# Altium PCB mct5.PcbDoc (part 2 of 3)
Units mil, origin at the board's own origin, x right, y up, seen from the top; angles counter-clockwise.
Board outline 3925 x 3925 mil, 2 copper layers (TopLayer, BottomLayer); 78 components, 100 nets, 891 pads, 16 vias.
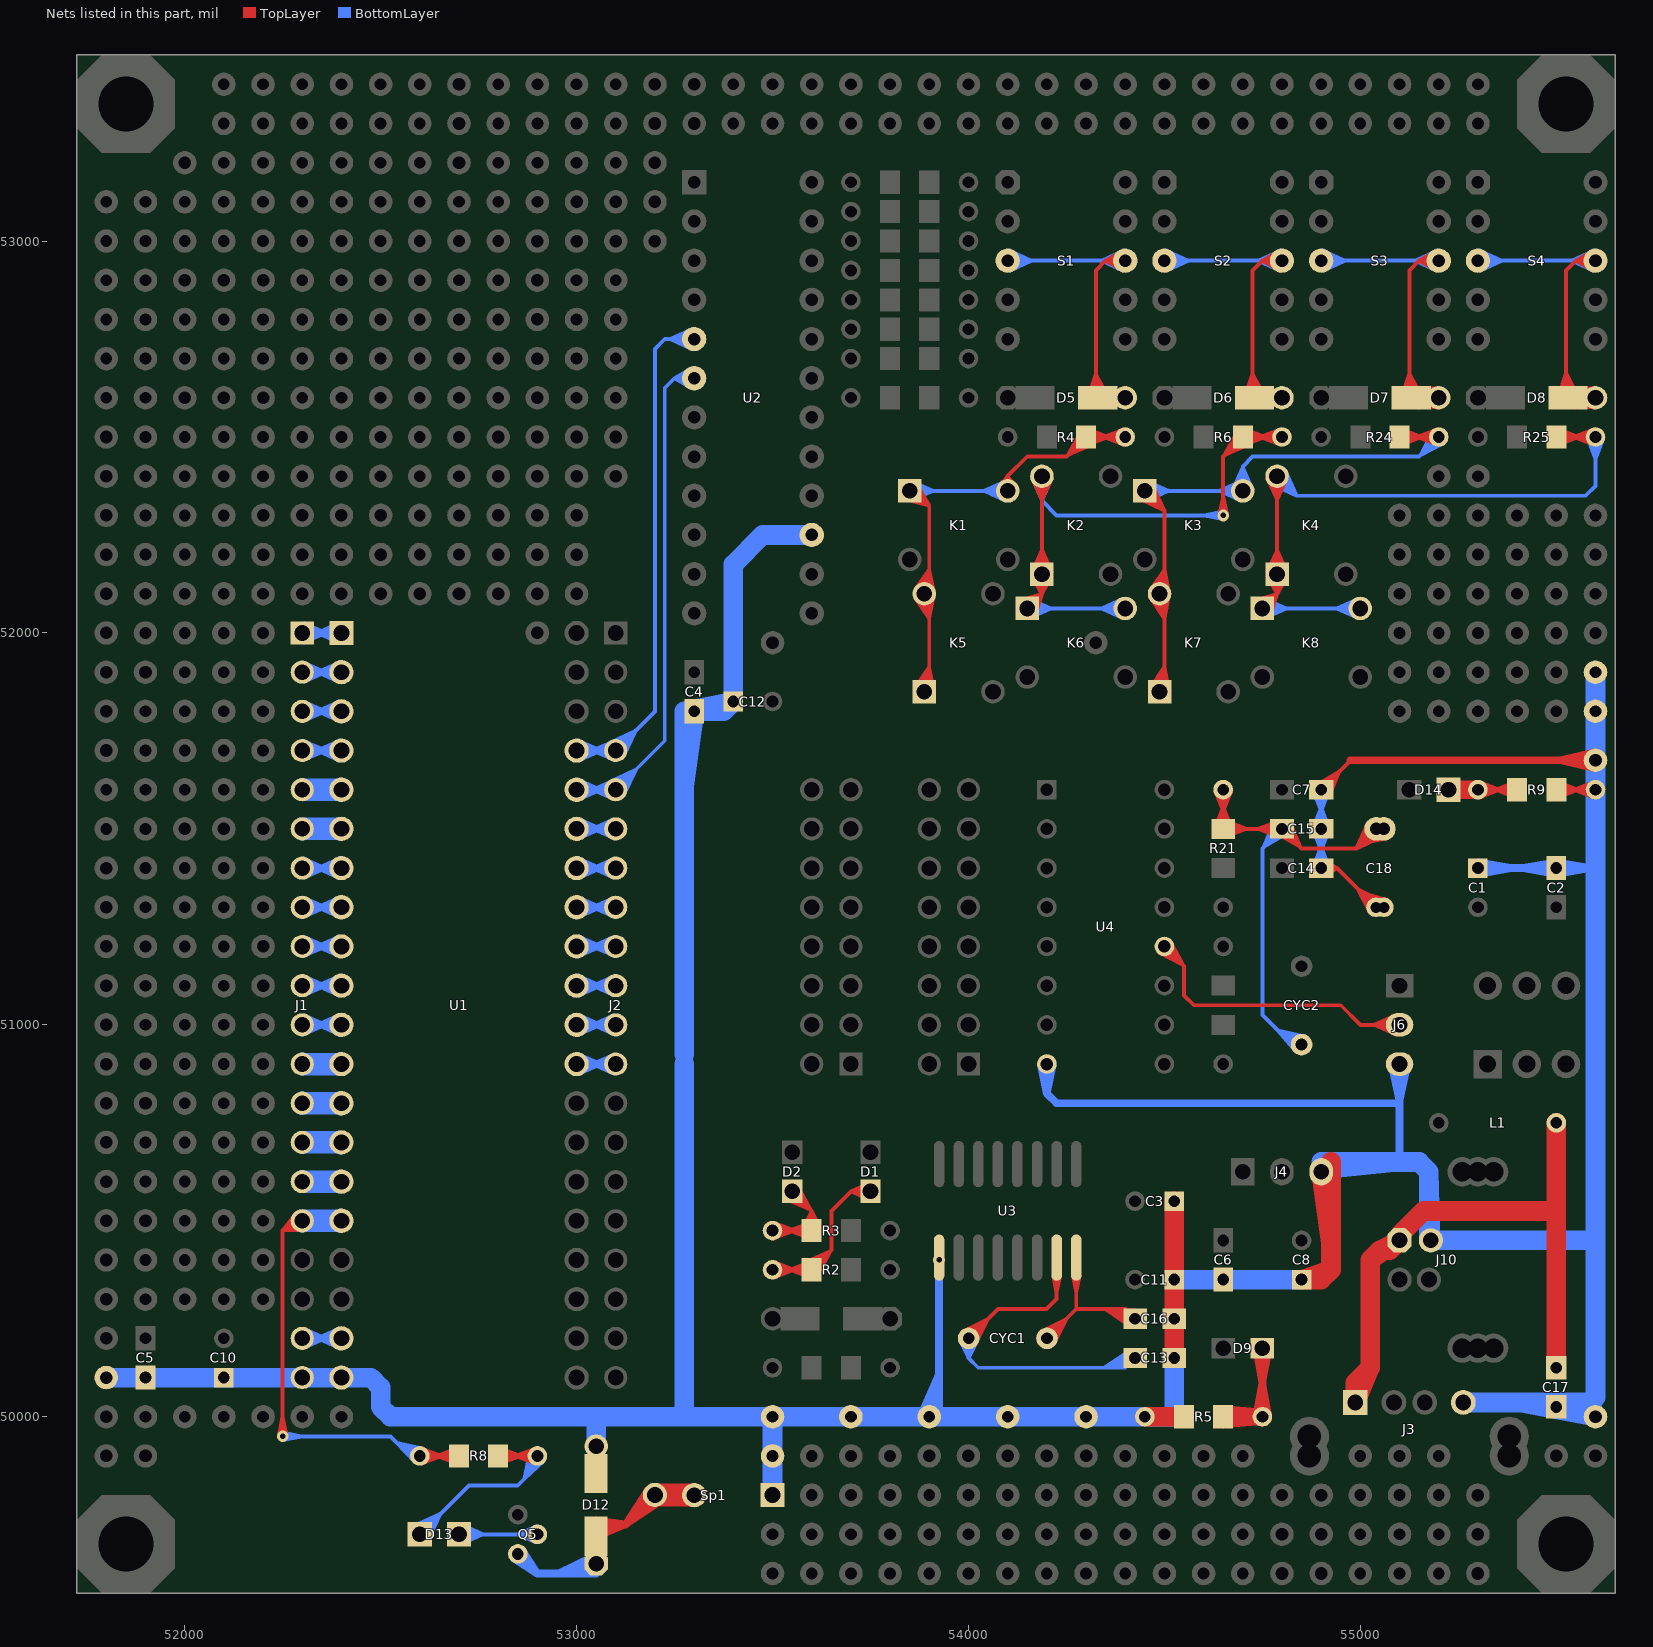
[diagram p2: the nets of this part, all layers, seen from the top]

## Via types
v1: diameter 30, hole 14, TopLayer to BottomLayer, 15 vias
v2: diameter 40, hole 28, TopLayer to BottomLayer, 1 vias

## Nets (pads, with @x,y where several pads share a name; then routed paths per layer and width w, separated by ;. In a path a pad name is that pad's centre, name@x,y a point inside that pad or via, vN(x,y) a via of type N, cw(c..) or ccw(c..) an arc to the next point about the centre after c; other vN are vias at no path point) (continued)
GND: C1.1 C2.2 C3.1 C4.2 C5.2 C6.2 C7.2 C8.1 C10.1 C11.2 C12.1 C13.2 C14.2 C15.2 C16.2 C17.2 C18.2 D12.2 D12.4 J1.20 J3.4 J4.3 J6.3 J10.4 pad.0@55600,51675 pad.7@55600,51800 pad.19@55600,51900 pad.27@54300,50000 pad.28@54100,50000 pad.29@53900,50000 pad.30@53700,50000 pad.31@53500,50000 pad.44@53500,49900 pad.45@55600,50000 pad.55 R5.1 R5.3 R9.1 R9.3 Sp1.1 U1.20 U2.15 U3.1 U4.8 | length 20800.3
  TopLayer w10: C7.2@54893.26,51615.42 54946.21,51646.21 ; C7.2@54899.02,51607.16 54946.21,51646.21 ; C14.2@54900,51400 54940,51400 ; C14.2@54906,51400 54940,51400 ; C7.2@54906,51600 54946.21,51646.21 ; C14.2@54907.47,51390.11 54940,51400 ; C14.2@54907.47,51409.89 54940,51400 ; C14.2@54911.88,51380.88 54940,51400 ; C14.2@54911.88,51419.12 54940,51400 ; C7.2@54914.05,51594.07 54946.21,51646.21 ; C7.2@54923.03,51589.51 54946.21,51646.21 ; 54925,51625 54975,51675 ; C18.2@55023.86,51288.19 54993.79,51346.21 ; C18.2@55032.41,51293.49 54993.79,51346.21 ; C18.2@55046.51,51307.59 54993.79,51346.21 ; C18.2@55046.77,51285 55003.64,51336.36 ; C18.2@55051.81,51316.14 54993.79,51346.21 ; C18.2@55053.97,51292.02 55003.64,51336.36 ; C18.2@55060,51300 55003.64,51336.36 ; C18.2@55064.78,51308.78 55003.64,51336.36 ; C18.2@55068.22,51318.23 55003.64,51336.36 ; R9.3@55500,51600 R9.1@55600,51600 ; R9.3@55501.01,51589.46 55555.59,51600 ; R9.3@55501.01,51610.54 55555.59,51600 ; R9.3@55503.81,51579.77 55555.59,51600 ; R9.3@55503.81,51620.23 55555.59,51600 ; R9.1@55596.36,51580.33 55545,51600 ; R9.1@55596.36,51619.67 55545,51600 ; R9.1@55599.09,51590.04 55545,51600 ; R9.1@55599.09,51609.96 55545,51600 ; 54940,51400 C18.2@55040,51300 ; 55003.64,51336.36 C18.2@55023.38,51288.88 ; 55003.64,51336.36 C18.2@55051.12,51316.62 ; 55003.64,51336.36 C18.2@55032.27,51293.65 ; 55003.64,51336.36 C18.2@55046.35,51307.73 ; 55003.64,51336.36 C18.2@55040,51300 ; 55003.64,51336.36 C18.2@55023.38,51288.88 ; 55003.64,51336.36 C18.2@55051.12,51316.62 ; 55003.64,51336.36 C18.2@55032.27,51293.65 ; 55003.64,51336.36 C18.2@55046.35,51307.73 ; 55003.64,51336.36 C18.2@55040,51300 ; 55003.64,51336.36 C18.2@55023.38,51288.88 ; 55003.64,51336.36 C18.2@55051.12,51316.62 ; 55003.64,51336.36 C18.2@55032.27,51293.65 ; 55003.64,51336.36 C18.2@55046.35,51307.73 ; 55003.64,51336.36 C18.2@55040,51300 ; 55003.64,51336.36 C18.2@55023.38,51288.88 ; 55003.64,51336.36 C18.2@55051.12,51316.62 ; 55003.64,51336.36 C18.2@55032.27,51293.65 ; 55003.64,51336.36 C18.2@55046.35,51307.73 ; 55003.64,51336.36 C18.2@55040,51300 ; 55003.64,51336.36 C18.2@55023.38,51288.88 ; 55003.64,51336.36 C18.2@55051.12,51316.62 ; 55003.64,51336.36 C18.2@55032.27,51293.65 ; 55003.64,51336.36 C18.2@55046.35,51307.73 ; 55003.64,51336.36 C18.2@55040,51300
  TopLayer w20: 54975,51675 pad.0@55600,51675 ; pad.0@55597.78,51655.12 55510,51675 pad.0@55597.78,51694.88
  TopLayer w50: R5.1@54450,50000 R5.3@54550,50000 ; C13.2@54525,50150 C16.2@54525,50250 C11.2@54525,50350 C3.1@54525,50550 ; J4.3@54900,50620 54925,50436.26 ; 54925,50650 54925,50375 ; C8.1@54850,50350 54900,50350 ; C8.1@54850,50350 54925,50375 ; C8.1@54850,50350 54900,50350 ; 54900,50350 54925,50375
  BottomLayer w10: C14.2@54880.33,51403.64 54900,51455 ; C15.2@54880.33,51496.36 54900,51445 ; C15.2@54880.33,51503.64 54900,51555 ; C7.2@54880.33,51596.36 54900,51545 ; C14.2@54890.04,51400.91 54900,51455 ; C15.2@54890.04,51499.09 54900,51445 ; C15.2@54890.04,51500.91 54900,51555 ; C7.2@54890.04,51599.09 54900,51545 ; C14.2@54900,51400 C15.2@54900,51500 C7.2@54900,51600 ; C14.2@54909.96,51400.91 54900,51455 ; C15.2@54909.96,51499.09 54900,51445 ; C15.2@54909.96,51500.91 54900,51555 ; C7.2@54909.96,51599.09 54900,51545 ; C14.2@54919.67,51403.64 54900,51455 ; C15.2@54919.67,51496.36 54900,51445 ; C15.2@54919.67,51503.64 54900,51555 ; C7.2@54919.67,51596.36 54900,51545
  BottomLayer w20: pad.29@53880.99,50006.21 53925,50108.66 ; pad.29@53900,50000 53925,50108.66 ; pad.29@53919.81,49997.28 53925,50108.66 ; 53925,50025 v1(53925,50400) ; U4.8@54185.08,50898.5 54200,50825 ; U4.8@54200,50900 54200,50825 ; U4.8@54214.92,50898.5 54200,50825 ; J6.3@55080.12,50897.78 55100,50810 J6.3@55119.88,50897.78 ; 55100,50650 55100,50800 ; J6.3@55100,50900 55100,50800 ; C1.1@55300,51400 C2.2@55500,51400 55600,51400 ; C1.1@55301.32,51385.06 55385,51400 C1.1@55301.32,51414.94 ; C2.2@55498.68,51385.06 55415,51400 C2.2@55498.68,51414.94 ; C2.2@55501.32,51385.06 55585,51400 C2.2@55501.32,51414.94 ; 54200,50825 54225,50800 55100,50800
  BottomLayer w30: 55586.42,50036.42 55600,50050 pad.45@55600,50000 55586.42,50036.42
  BottomLayer w50: pad.55@51800,50100 52150,50100 J1.20@52300,50100 U1.20@52400,50100 52475,50100 52500,50075 52500,50025 52525,50000 53000,50000 ; 52875,50000 53000,50000 ; D12.2@53050,49925 53050,50000 ; 53275,50900 53275,50000 ; 53275,50925 C4.2@53275,51800 ; 53275,51610.73 C4.2@53300,51794 ; 53375,50000 53275,50000 ; 53400,51850 53400,52175 53475,52250 ; 53400,52000 C12.1@53400,51825 ; Sp1.1@53499.91,49800.33 pad.44@53500,49900 ; Sp1.1@53500,49800.33 pad.44@53500,49900 ; pad.31@53500,49999.58 pad.44@53500,49900 ; pad.31@53500,50000 pad.44@53500,49900 ; 54525,50025 C13.2@54525,50150 ; C11.2@54525,50350 C6.2@54650,50350 C8.1@54850,50350 ; 54550,50000 53275,50000 ; J4.3@54900,50630 55086.76,50650 ; J4.3@54900,50650 55100,50650 55150,50650 55175,50625 ; J10.4@55175,50450 55175,50625 ; J3.4@55262.8,50036.42 55586.42,50036.42 ; C17.2@55500,50021 pad.45@55600,50000 ; 55575,50450 J10.4@55180,50450 55175,50625 ; 55600,50050 55600,51400 R9.1@55600,51600 ; 55600,51855 pad.0@55600,51675 R9.1@55600,51600 ; pad.19@55600,51900 55600,51700 R9.1@55600,51600 ; 53000,50000 53050,50000 ; 53050,50000 53275,50000 ; C4.2@53275,51800 C12.1@53375,51800 ; C4.2@53275,51800 C12.1@53400,51825 ; C12.1@53375,51800 C12.1@53400,51825 ; C12.1@53375,51800 C4.2@53300,51800 C12.1@53400,51825 ; 53475,52250 U2.15@53600,52250 53475,52250 ; 55586.42,50036.42 pad.45@55600,50000 ; 55586.42,50036.42 55500,50029 55405.27,50036.42 pad.45@55600,50000
NetC13_1: C13.1 CYC1.2 U3.7 | length 1905.6
  TopLayer w10: CYC1.2@53987.35,50218.36 54049.16,50248.78 ; CYC1.2@53992.45,50209.67 54049.16,50248.78 ; CYC1.2@54000.45,50200.07 54075,50274.62 54199.62,50274.62 54225,50300 U3.7@54225,50406 ; CYC1.2@54010.05,50192.07 54049.16,50248.78 ; CYC1.2@54018.74,50186.97 54049.16,50248.78 ; U3.7@54216.54,50359.67 54225,50317 ; U3.7@54225,50360.5 54225,50317 ; U3.7@54233.46,50359.67 54225,50317
  BottomLayer w10: CYC1.2@53978.51,50195.06 54000.45,50149.55 ; CYC1.2@53988.05,50198.52 54000.45,50149.55 ; CYC1.2@54000.45,50174.55 CYC1.2@54000.45,50200.07 54000.45,50149.55 ; CYC1.2@54012.85,50198.52 54000.45,50149.55 ; CYC1.2@54022.39,50195.06 54000.45,50149.55 ; C13.1@54411.74,50168.85 54346.34,50125 ; C13.1@54416.79,50160.16 54346.34,50125 ; C13.1@54417.43,50157.57 C13.1@54425,50150 54400,50125 54025,50125 54000.45,50149.55 ; C13.1@54421,50150 54346.34,50125 ; C13.1@54423.76,50139.35 54346.34,50125 ; C13.1@54424.95,50129.38 54346.34,50125
NetC15_1: C15.1 C18.1 CYC2.1 R21.1 R21.3 | length 5130.2
  TopLayer w10: R21.3@54629.77,51503.81 54650,51555.59 ; R21.1@54630.33,51596.36 54650,51545 ; R21.3@54639.46,51501.01 54650,51555.59 ; R21.1@54640.04,51599.09 54650,51545 ; R21.3@54650,51500 54650,51555.59 ; R21.1@54650,51600 54650,51525 54675,51500 C15.1@54800,51500 54850,51450 54990,51450 ; R21.3@54653.94,51500 54709.53,51500 ; R21.3@54654.95,51489.46 54709.53,51500 ; R21.3@54654.95,51510.54 54709.53,51500 ; R21.3@54657.75,51479.77 54709.53,51500 ; R21.3@54657.75,51520.23 54709.53,51500 ; R21.1@54659.96,51599.09 54650,51545 ; R21.3@54660.54,51501.01 54650,51555.59 ; R21.1@54669.67,51596.36 54650,51545 ; R21.3@54670.23,51503.81 54650,51555.59 ; C15.1@54790.36,51480.33 54739,51500 ; C15.1@54790.36,51519.67 54739,51500 ; C15.1@54793.09,51490.04 54739,51500 ; C15.1@54793.09,51509.96 54739,51500 ; C15.1@54793.26,51484.58 54846.21,51453.79 ; C15.1@54794,51500 54739,51500 ; C15.1@54799.02,51492.84 54846.21,51453.79 ; C15.1@54806,51500 54846.21,51453.79 ; C15.1@54814.05,51505.93 54846.21,51453.79 ; C15.1@54823.03,51510.49 54846.21,51453.79 ; C18.1@55019.48,51514.27 54990,51450 ; C18.1@55028.33,51509.42 54990,51450 ; C18.1@55042.75,51518.1 55002.07,51462.07 ; C18.1@55049.42,51488.33 54990,51450 ; C18.1@55050.47,51511.59 55002.07,51462.07 ; C18.1@55054.27,51479.48 54990,51450 ; C18.1@55060,51500 55002.07,51462.07 ; C18.1@55066.81,51486.63 55002.07,51462.07 ; C18.1@55069.69,51476.96 55002.07,51462.07 ; 54990,51450 C18.1@55040,51500 ; 55002.07,51462.07 C18.1@55053.07,51478.69 ; 55002.07,51462.07 C18.1@55018.69,51513.07 ; 55002.07,51462.07 C18.1@55049.02,51488.01 ; 55002.07,51462.07 C18.1@55028.01,51509.02 ; 55002.07,51462.07 C18.1@55040,51500 ; 55002.07,51462.07 C18.1@55053.07,51478.69 ; 55002.07,51462.07 C18.1@55018.69,51513.07 ; 55002.07,51462.07 C18.1@55049.02,51488.01 ; 55002.07,51462.07 C18.1@55028.01,51509.02 ; 55002.07,51462.07 C18.1@55040,51500 ; 55002.07,51462.07 C18.1@55053.07,51478.69 ; 55002.07,51462.07 C18.1@55018.69,51513.07 ; 55002.07,51462.07 C18.1@55049.02,51488.01 ; 55002.07,51462.07 C18.1@55028.01,51509.02 ; 55002.07,51462.07 C18.1@55040,51500 ; 55002.07,51462.07 C18.1@55053.07,51478.69 ; 55002.07,51462.07 C18.1@55018.69,51513.07 ; 55002.07,51462.07 C18.1@55049.02,51488.01 ; 55002.07,51462.07 C18.1@55028.01,51509.02 ; 55002.07,51462.07 C18.1@55040,51500 ; 55002.07,51462.07 C18.1@55053.07,51478.69 ; 55002.07,51462.07 C18.1@55018.69,51513.07 ; 55002.07,51462.07 C18.1@55049.02,51488.01 ; 55002.07,51462.07 C18.1@55028.01,51509.02 ; 55002.07,51462.07 C18.1@55040,51500
  BottomLayer w10: C15.1@54776.97,51510.49 54753.79,51453.79 ; C15.1@54785.95,51505.93 54753.79,51453.79 ; C15.1@54794,51500 54753.79,51453.79 ; C15.1@54800,51500 54750,51450 54750,51025 54825.45,50949.55 CYC2.1@54850.07,50949.55 54789.43,50985.57 ; C15.1@54800.98,51492.84 54753.79,51453.79 ; C15.1@54806.74,51484.58 54753.79,51453.79 ; CYC2.1@54835.64,50932.29 54789.43,50985.57 ; CYC2.1@54842.76,50939.41 54789.43,50985.57 ; CYC2.1@54855.48,50960.82 54789.43,50985.57 ; CYC2.1@54858.33,50970.48 54789.43,50985.57
NetC16_1: C16.1 CYC1.1 U3.8 | length 1179
  TopLayer w10: CYC1.1@54187.35,50218.36 54249.16,50248.78 ; CYC1.1@54192.45,50209.67 54249.16,50248.78 ; CYC1.1@54200.45,50200.07 54275,50274.62 ; CYC1.1@54210.05,50192.07 54249.16,50248.78 ; CYC1.1@54218.74,50186.97 54249.16,50248.78 ; U3.8@54266.54,50359.67 54275,50317 ; U3.8@54275,50360.5 54275,50317 ; U3.8@54275,50406 54275,50274.62 ; U3.8@54283.46,50359.67 54275,50317 ; C16.1@54411.42,50231.31 54349.96,50274.62 ; C16.1@54416.65,50239.9 54349.96,50274.62 ; C16.1@54421,50250 54349.96,50274.62 ; C16.1@54423.83,50260.63 54349.96,50274.62 ; C16.1@54425,50250 54400.38,50274.62 54275,50274.62 ; C16.1@54425.04,50270.61 54349.96,50274.62
NetC17_1: C17.1 J3.1 J10.1 L1.1 | length 2063.9
  TopLayer w50: C17.1@55500,50125 55500,50525 ; C17.1@55500,50129 55500,50305 ; L1.1@55500,50750 55500,50525 ; J3.1@54987.2,50036.42 54987.2,50087.2 ; J3.1@54987.2,50036.42 55025,50125 ; J3.1@54987.2,50036.42 54987.2,50087.2 ; 54987.2,50087.2 55025,50125 ; 55025,50125 55025,50400 ; 55025,50400 55050,50425 ; 55025,50400 J10.1@55100,50450 ; 55050,50425 55075,50425 J10.1@55100,50450 ; 55050,50425 J10.1@55100,50450 ; 55050,50425 J10.1@55100,50450 ; J10.1@55100,50450 55100,50463.34 55161.66,50525 55500,50525
NetD1_2: D1.2 R2.2 R2.4 | length 1351.1
  TopLayer w10: R2.2@53500,50375 R2.4@53600,50375 53650,50425 53650,50525 53700,50575 ; R2.2@53500.91,50365.04 53555,50375 ; R2.2@53500.91,50384.96 53555,50375 ; R2.2@53503.64,50355.33 53555,50375 ; R2.2@53503.64,50394.67 53555,50375 ; R2.4@53588.74,50396.18 53646.8,50421.8 ; R2.4@53593.52,50387.32 53646.8,50421.8 ; R2.4@53596.19,50354.77 53544.41,50375 ; R2.4@53596.19,50395.23 53544.41,50375 ; R2.4@53598.99,50364.46 53544.41,50375 ; R2.4@53598.99,50385.54 53544.41,50375 ; R2.4@53600,50378.94 53646.8,50421.8 ; R2.4@53607.78,50371.75 53646.8,50421.8 ; R2.4@53616.19,50366.21 53646.8,50421.8 ; D1.2@53745.59,50554.47 53700,50575 ; D1.2@53745.59,50595.53 53700,50575 ; D1.2@53748.79,50564.07 53700,50575 ; D1.2@53748.79,50585.93 53700,50575 ; D1.2@53750,50575 53700,50575
NetD2_2: D2.2 R3.2 R3.4 | length 1213.4
  TopLayer w10: R3.2@53500,50475 R3.4@53600,50475 53600,50525 ; R3.2@53500.91,50465.04 53555,50475 ; R3.2@53500.91,50484.96 53555,50475 ; R3.2@53503.64,50455.33 53555,50475 ; R3.2@53503.64,50494.67 53555,50475 ; D2.2@53538.55,50553.39 53597.21,50527.79 ; D2.2@53543.3,50562.28 53597.21,50527.79 ; D2.2@53550,50571 53597.21,50527.79 ; D2.2@53550,50575 53600,50525 ; D2.2@53558.1,50578.45 53597.21,50527.79 ; D2.2@53566.53,50583.96 53597.21,50527.79 ; R3.4@53579.93,50483.54 53600,50525 ; R3.4@53589.48,50480.15 53600,50525 ; R3.4@53596.19,50454.77 53544.41,50475 ; R3.4@53596.19,50495.23 53544.41,50475 ; R3.4@53598.99,50464.46 53544.41,50475 ; R3.4@53598.99,50485.54 53544.41,50475 ; R3.4@53600,50478.94 53600,50525 ; R3.4@53610.52,50480.15 53600,50525 ; R3.4@53620.07,50483.54 53600,50525
NetD5_2: D5.2 D5.4 S1.3 S1.8 | length 2045.2
  TopLayer w10: D5.4@54305.66,52602.99 54325,52659.95 ; D5.4@54315.48,52600.55 54325,52659.95 ; D5.4@54344.23,52602.95 54325,52659.95 ; D5.4@54353.51,52606.98 54325,52659.95 ; S1.8@54393.24,52924.89 54350,52950 ; S1.8@54393.24,52975.11 54350,52950 ; S1.8@54397.44,52934.21 54350,52950 ; S1.8@54397.44,52965.79 54350,52950 ; S1.8@54399.64,52944.01 54350,52950 ; S1.8@54399.64,52955.99 54350,52950 ; S1.8@54400,52950 54350,52950 ; 54325,52659.95 D5.4@54330,52600 54325,52605 54325,52925 54350,52950
  BottomLayer w10: S1.3@54100,52950 S1.8@54400,52950 ; S1.3@54100.3,52944.01 54161,52950 ; S1.3@54100.3,52955.99 54161,52950 ; S1.3@54102.1,52934.14 54161,52950 ; S1.3@54102.1,52965.86 54161,52950 ; S1.3@54105.54,52924.6 54161,52950 ; S1.3@54105.54,52975.4 54161,52950 ; S1.8@54394.46,52924.6 54339,52950 ; S1.8@54394.46,52975.4 54339,52950 ; S1.8@54397.9,52934.14 54339,52950 ; S1.8@54397.9,52965.86 54339,52950 ; S1.8@54399.7,52944.01 54339,52950 ; S1.8@54399.7,52955.99 54339,52950
NetD6_2: D6.2 D6.4 S2.3 S2.8 | length 2045.2
  TopLayer w10: D6.4@54705.66,52602.99 54725,52659.95 ; D6.4@54715.48,52600.55 54725,52659.95 ; D6.4@54744.23,52602.95 54725,52659.95 ; D6.4@54753.51,52606.98 54725,52659.95 ; S2.8@54793.24,52924.89 54750,52950 ; S2.8@54793.24,52975.11 54750,52950 ; S2.8@54797.44,52934.21 54750,52950 ; S2.8@54797.44,52965.79 54750,52950 ; S2.8@54799.64,52944.01 54750,52950 ; S2.8@54799.64,52955.99 54750,52950 ; S2.8@54800,52950 54750,52950 ; 54725,52659.95 D6.4@54730,52600 54725,52605 54725,52925 54750,52950
  BottomLayer w10: S2.3@54500,52950 S2.8@54800,52950 ; S2.3@54500.3,52944.01 54561,52950 ; S2.3@54500.3,52955.99 54561,52950 ; S2.3@54502.1,52934.14 54561,52950 ; S2.3@54502.1,52965.86 54561,52950 ; S2.3@54505.54,52924.6 54561,52950 ; S2.3@54505.54,52975.4 54561,52950 ; S2.8@54794.46,52924.6 54739,52950 ; S2.8@54794.46,52975.4 54739,52950 ; S2.8@54797.9,52934.14 54739,52950 ; S2.8@54797.9,52965.86 54739,52950 ; S2.8@54799.7,52944.01 54739,52950 ; S2.8@54799.7,52955.99 54739,52950
NetD7_2: D7.2 D7.4 S3.3 S3.8 | length 4581.8
  TopLayer w10: D7.4@55105.65,52602.92 55125,52661.42 ; D7.4@55115.48,52600.54 55125,52661.42 ; D7.4@55130,52600 55125,52661.42 ; D7.4@55144.17,52576.3 D7.2@55193.75,52575.79 ; D7.4@55144.17,52623.7 D7.2@55193.75,52624.21 ; D7.4@55144.24,52602.88 55125,52661.42 ; D7.4@55145.31,52586.42 D7.2@55193.75,52575.79 ; D7.4@55145.31,52613.58 D7.2@55193.75,52624.21 ; D7.4@55148.2,52585.65 D7.2@55197.75,52585.17 ; D7.4@55148.2,52614.35 D7.2@55197.75,52614.83 ; D7.4@55149.15,52575.51 D7.2@55197.75,52585.17 ; D7.4@55149.15,52624.49 D7.2@55197.75,52614.83 ; D7.4@55152.6,52585.63 D7.2@55200,52600 ; D7.4@55152.6,52614.37 D7.2@55200,52600 ; D7.4@55153.56,52606.82 55125,52661.42 ; D7.4@55156.55,52576.24 D7.2@55200,52600 ; D7.4@55156.55,52623.76 D7.2@55200,52600 ; D7.4@55156.81,52586.93 D7.2@55197.75,52614.83 ; D7.4@55156.81,52613.07 D7.2@55197.75,52585.17 ; D7.4@55159.34,52588.5 D7.2@55193.75,52624.21 ; D7.4@55159.34,52611.5 D7.2@55193.75,52575.79 ; D7.4@55163.38,52579.14 D7.2@55197.75,52614.83 ; D7.4@55163.38,52620.86 D7.2@55197.75,52585.17 ; D7.4@55167.37,52582.22 D7.2@55193.75,52624.21 ; D7.4@55167.37,52617.78 D7.2@55193.75,52575.79 ; S3.8@55193.24,52924.89 55150,52950 ; S3.8@55193.24,52975.11 55150,52950 ; S3.8@55197.44,52934.21 55150,52950 ; S3.8@55197.44,52965.79 55150,52950 ; S3.8@55199.64,52944.01 55150,52950 ; S3.8@55199.64,52955.99 55150,52950 ; S3.8@55200,52950 55150,52950 ; D7.4@55150,52600 55125,52625 55125,52925 55150,52950 ; D7.4@55150,52600 D7.2@55200,52600 ; D7.4@55150,52600 D7.2@55193.75,52575.79 ; D7.4@55150,52600 D7.2@55193.75,52624.21 ; D7.4@55150,52600 D7.2@55197.75,52585.17 ; D7.4@55150,52600 D7.2@55197.75,52614.83 ; D7.4@55150.47,52600 D7.2@55193.75,52575.79 ; D7.4@55150.47,52600 D7.2@55193.75,52624.21 ; D7.4@55150.47,52600 D7.2@55200,52600 ; D7.4@55150.47,52600 D7.2@55197.75,52585.17 ; D7.4@55150.47,52600 D7.2@55197.75,52614.83
  BottomLayer w10: 54961,52950 54905.54,52975.4 54961,52950 ; 54961,52950 54905.54,52924.6 54961,52950 ; 54961,52950 54902.1,52965.86 54961,52950 ; 54961,52950 54902.1,52934.14 54961,52950 ; 54961,52950 54900.3,52955.99 54961,52950 ; 54961,52950 54900.3,52944.01 54961,52950 ; 55139,52950 55194.46,52924.6 55139,52950 ; 55139,52950 55194.46,52975.4 55139,52950 ; 55139,52950 55197.9,52934.14 55139,52950 ; 55139,52950 55197.9,52965.86 55139,52950 ; 55139,52950 55199.7,52944.01 55139,52950 ; 55139,52950 55199.7,52955.99 55139,52950 ; S3.3@54900,52950 S3.8@55200,52950 S3.3@54900,52950
NetD8_2: D8.2 D8.4 S4.3 S4.8 | length 3549.8
  TopLayer w10: D8.4@55505.65,52602.92 55525,52661.42 ; D8.4@55515.48,52600.54 55525,52661.42 ; D8.4@55530,52600 55525,52661.42 ; D8.4@55544.17,52576.3 D8.2@55593.75,52575.79 ; D8.4@55544.17,52623.7 D8.2@55593.75,52624.21 ; D8.4@55544.24,52602.88 55525,52661.42 ; D8.4@55545.31,52586.42 D8.2@55593.75,52575.79 ; D8.4@55545.31,52613.58 D8.2@55593.75,52624.21 ; D8.4@55548.2,52585.65 D8.2@55597.75,52585.17 ; D8.4@55548.2,52614.35 D8.2@55597.75,52614.83 ; D8.4@55549.15,52575.51 D8.2@55597.75,52585.17 ; D8.4@55549.15,52624.49 D8.2@55597.75,52614.83 ; D8.4@55552.6,52585.63 D8.2@55600,52600 ; D8.4@55552.6,52614.37 D8.2@55600,52600 ; D8.4@55553.56,52606.82 55525,52661.42 ; D8.4@55556.55,52576.24 D8.2@55600,52600 ; D8.4@55556.55,52623.76 D8.2@55600,52600 ; D8.4@55556.81,52586.93 D8.2@55597.75,52614.83 ; D8.4@55556.81,52613.07 D8.2@55597.75,52585.17 ; D8.4@55559.34,52588.5 D8.2@55593.75,52624.21 ; D8.4@55559.34,52611.5 D8.2@55593.75,52575.79 ; D8.4@55563.38,52579.14 D8.2@55597.75,52614.83 ; D8.4@55563.38,52620.86 D8.2@55597.75,52585.17 ; D8.4@55567.37,52582.22 D8.2@55593.75,52624.21 ; D8.4@55567.37,52617.78 D8.2@55593.75,52575.79 ; S4.8@55593.24,52924.89 55550,52950 ; S4.8@55593.24,52975.11 55550,52950 ; S4.8@55597.44,52934.21 55550,52950 ; S4.8@55597.44,52965.79 55550,52950 ; S4.8@55599.64,52944.01 55550,52950 ; S4.8@55599.64,52955.99 55550,52950 ; S4.8@55600,52950 55550,52950 ; D8.4@55550,52600 D8.2@55600,52600 ; D8.4@55550,52600 55525,52625 55525,52925 55550,52950 ; D8.4@55550,52600 D8.2@55593.75,52575.79 ; D8.4@55550,52600 D8.2@55593.75,52624.21 ; D8.4@55550,52600 D8.2@55597.75,52585.17 ; D8.4@55550,52600 D8.2@55597.75,52614.83 ; D8.4@55550.47,52600 D8.2@55593.75,52575.79 ; D8.4@55550.47,52600 D8.2@55593.75,52624.21 ; D8.4@55550.47,52600 D8.2@55600,52600 ; D8.4@55550.47,52600 D8.2@55597.75,52585.17 ; D8.4@55550.47,52600 D8.2@55597.75,52614.83
  BottomLayer w10: S4.3@55300,52950 S4.8@55600,52950 ; S4.3@55300.3,52944.01 55361,52950 ; S4.3@55300.3,52955.99 55361,52950 ; S4.3@55302.1,52934.14 55361,52950 ; S4.3@55302.1,52965.86 55361,52950 ; S4.3@55305.54,52924.6 55361,52950 ; S4.3@55305.54,52975.4 55361,52950 ; S4.8@55594.46,52924.6 55539,52950 ; S4.8@55594.46,52975.4 55539,52950 ; S4.8@55597.9,52934.14 55539,52950 ; S4.8@55597.9,52965.86 55539,52950 ; S4.8@55599.7,52944.01 55539,52950 ; S4.8@55599.7,52955.99 55539,52950
NetD9_2: D9.2 R5.2 R5.4 | length 1471.8
  TopLayer w20: R5.4@54649.85,49980.47 R5.2@54735.17,49987.47 ; R5.4@54649.85,50019.53 R5.2@54735.17,50012.53 ; R5.4@54650,49996.06 R5.2@54735.17,49987.47 ; R5.4@54650,50000 R5.2@54750,50000 D9.2@54750,50175 ; R5.4@54650,50003.94 R5.2@54735.17,50012.53 ; R5.4@54651.42,49984.47 54735.59,50000 R5.4@54651.42,50015.53 ; R5.4@54652.97,49988.63 R5.2@54735.17,50012.53 ; R5.4@54652.97,50011.37 R5.2@54735.17,49987.47 ; D9.2@54734.07,50173.51 54750,50089 D9.2@54765.93,50173.51 ; R5.2@54735.06,50001.32 54750,50085 R5.2@54764.94,50001.32 ; R5.2@54748.68,49985.06 54665,50000 R5.2@54748.68,50014.94
NetD12_1: D12.1 D12.3 Q5.3 Sp1.2 Sp1.3 | length 2649.9
  TopLayer w20: D12.3@53050,49715.47 53125,49725 ; D12.3@53050.06,49735 53125,49725 ; D12.3@53054.94,49696.58 53125,49725 ; D12.3@53055.42,49725 53125,49725 ; 53124.79,49725.21 Sp1.3@53199.91,49800.33 ; Sp1.3@53183.64,49813.6 53126.49,49726.9 Sp1.3@53213.18,49784.06 ; Sp1.3@53202.26,49779.46 Sp1.2@53290.91,49800 ; Sp1.3@53202.41,49821.18 Sp1.2@53290.91,49800 ; Sp1.2@53293.26,49780.11 Sp1.3@53210.27,49819.3 ; Sp1.2@53293.39,49819.93 Sp1.3@53210.19,49781.3 ; Sp1.2@53297.51,49779.15 Sp1.3@53209,49800.3 ; Sp1.2@53297.58,49779.14 53209,49800 Sp1.2@53297.58,49820.86 ; Sp1.2@53297.65,49820.87 Sp1.3@53209,49800.3 ; Sp1.2@53301.9,49779.09 Sp1.3@53210.19,49781.3 ; Sp1.2@53302.04,49820.9 Sp1.3@53210.27,49819.3 ; Sp1.3@53199.91,49800.33 53200.24,49800 Sp1.2@53300,49800 ; Sp1.3@53199.91,49800.33 Sp1.2@53290.91,49800 ; Sp1.3@53209,49800.3 Sp1.2@53300,49800 ; Sp1.3@53210.19,49781.3 Sp1.2@53300,49800 ; Sp1.3@53210.27,49819.3 Sp1.2@53300,49800
  BottomLayer w20: Q5.3@52840.58,49638.33 52900,49600 ; Q5.3@52850,49650 52900,49600 ; Q5.3@52861.67,49659.42 52900,49600 ; D12.1@53043.04,49643.75 52953.94,49600 ; D12.1@53050,49600 52900,49600 ; D12.1@53050,49625 52953.94,49600 ; D12.1@53053.06,49605.24 52953.94,49600 ; Sp1.3@53199.91,49800.33 Sp1.3@53200.24,49800 ; Sp1.2@53299.67,49800.33 Sp1.2@53300,49800
NetD13_1: D13.1 Q5.2 | length 786
  BottomLayer w10: D13.1@52700,49700 Q5.2@52900,49700 ; D13.1@52700.3,49694.01 52761,49700 ; D13.1@52700.3,49705.99 52761,49700 ; D13.1@52702.1,49684.14 52761,49700 ; D13.1@52702.1,49715.86 52761,49700 ; D13.1@52705.54,49674.6 52761,49700 ; D13.1@52705.54,49725.4 52761,49700 ; Q5.2@52896.36,49680.33 52845,49700 ; Q5.2@52896.36,49719.67 52845,49700 ; Q5.2@52899.09,49690.04 52845,49700 ; Q5.2@52899.09,49709.96 52845,49700
NetD13_2: D13.2 R8.1 R8.3 | length 1716.5
  TopLayer w10: R8.3@52800,49900 R8.1@52900,49900 ; R8.3@52801.01,49889.46 52855.59,49900 ; R8.3@52801.01,49910.54 52855.59,49900 ; R8.3@52803.81,49879.77 52855.59,49900 ; R8.3@52803.81,49920.23 52855.59,49900 ; R8.1@52896.36,49880.33 52845,49900 ; R8.1@52896.36,49919.67 52845,49900 ; R8.1@52899.09,49890.04 52845,49900 ; R8.1@52899.09,49909.96 52845,49900
  BottomLayer w10: D13.2@52585.14,49721.33 52652.21,49752.21 ; D13.2@52589.98,49712.47 52652.21,49752.21 ; D13.2@52595.93,49704.41 52652.21,49752.21 ; D13.2@52600,49700 52725,49825 52850,49825 52900,49875 R8.1@52900,49900 52867,49842 ; D13.2@52604.41,49695.93 52652.21,49752.21 ; D13.2@52612.47,49689.98 52652.21,49752.21 ; D13.2@52621.33,49685.14 52652.21,49752.21 ; R8.1@52881.33,49907.17 52867,49842 ; R8.1@52890.96,49904.28 52867,49842 ; R8.1@52908.3,49894.42 52867,49842 ; R8.1@52915.71,49887.62 52867,49842
NetD14_2: D14.2 R9.2 R9.4 | length 2887
  TopLayer w10: D14.2@55225,51600 R9.2@55300,51600 ; D14.2@55225.3,51594.01 R9.2@55286,51600 ; D14.2@55225.3,51605.99 R9.2@55286,51600 ; D14.2@55227.1,51584.14 R9.2@55286,51600 ; D14.2@55227.1,51615.86 R9.2@55286,51600 ; D14.2@55230.54,51574.6 R9.2@55286,51600 ; D14.2@55230.54,51625.4 R9.2@55286,51600 ; R9.2@55290.36,51582.48 D14.2@55245.72,51618.45 ; R9.2@55290.36,51617.52 D14.2@55245.72,51581.55 ; R9.2@55292.62,51581.41 D14.2@55245.18,51610.99 ; R9.2@55292.62,51618.59 D14.2@55245.18,51589.01 ; R9.2@55294.94,51580.65 D14.2@55245.02,51604.05 ; R9.2@55294.94,51619.35 D14.2@55245.02,51595.95 ; R9.2@55295.97,51590.85 D14.2@55245.72,51618.45 ; R9.2@55295.97,51609.15 D14.2@55245.72,51581.55 ; R9.2@55296.36,51580.33 D14.2@55245,51600 ; R9.2@55296.36,51619.67 D14.2@55245,51600 ; R9.2@55297.17,51590.41 D14.2@55245.18,51610.99 ; R9.2@55297.17,51609.59 D14.2@55245.18,51589.01 ; R9.2@55297.83,51580.12 D14.2@55245.02,51595.95 ; R9.2@55297.83,51619.88 D14.2@55245.02,51604.05 ; R9.2@55298.36,51590.13 D14.2@55245.02,51604.05 ; R9.2@55298.36,51609.87 D14.2@55245.02,51595.95 ; R9.2@55299.09,51590.04 D14.2@55245,51600 ; R9.2@55299.09,51609.96 D14.2@55245,51600 ; R9.2@55299.83,51590 D14.2@55245.02,51595.95 ; R9.2@55299.83,51610 D14.2@55245.02,51604.05 ; R9.2@55300.36,51580 D14.2@55245.18,51589.01 ; R9.2@55300.36,51620 D14.2@55245.18,51610.99 ; R9.2@55300.91,51590.04 55355,51600 ; R9.2@55300.91,51609.96 55355,51600 ; R9.2@55301.08,51590.06 D14.2@55245.18,51589.01 ; R9.2@55301.08,51609.94 D14.2@55245.18,51610.99 ; R9.2@55302.38,51590.29 D14.2@55245.72,51581.55 ; R9.2@55302.38,51609.71 D14.2@55245.72,51618.45 ; R9.2@55303.03,51580.23 D14.2@55245.72,51581.55 ; R9.2@55303.03,51619.77 D14.2@55245.72,51618.45 ; R9.2@55303.64,51580.33 55355,51600 ; R9.2@55303.64,51619.67 55355,51600 ; R9.4@55396.19,51579.77 55344.41,51600 ; R9.4@55396.19,51620.23 55344.41,51600 ; R9.4@55398.99,51589.46 55344.41,51600 ; R9.4@55398.99,51610.54 55344.41,51600 ; R9.4@55400,51600 R9.2@55300,51600 ; D14.2@55245.02,51595.95 R9.2@55300,51600 ; D14.2@55245.02,51604.05 R9.2@55300,51600 ; D14.2@55245.18,51589.01 R9.2@55300,51600 ; D14.2@55245.18,51610.99 R9.2@55300,51600 ; D14.2@55245.72,51581.55 R9.2@55300,51600 ; D14.2@55245.72,51618.45 R9.2@55300,51600
NetJ1_19: J1.19 U1.19 | length 704.1
  BottomLayer w10: J1.19@52300,50200 U1.19@52400,50200 ; J1.19@52301.77,50185.58 52359.53,50200 ; J1.19@52301.77,50214.42 52359.53,50200 ; J1.19@52305.05,50176 52359.53,50200 ; J1.19@52305.05,50224 52359.53,50200 ; U1.19@52394.46,50174.6 52339,50200 ; U1.19@52394.46,50225.4 52339,50200 ; U1.19@52397.9,50184.14 52339,50200 ; U1.19@52397.9,50215.86 52339,50200 ; U1.19@52399.7,50194.01 52339,50200 ; U1.19@52399.7,50205.99 52339,50200
NetJ2_10: J2.10 U1.31 | length 704.1
  BottomLayer w10: U1.31@53000,51100 J2.10@53100,51100 ; U1.31@53000.3,51094.01 53061,51100 ; U1.31@53000.3,51105.99 53061,51100 ; U1.31@53002.1,51084.14 53061,51100 ; U1.31@53002.1,51115.86 53061,51100 ; U1.31@53005.54,51074.6 53061,51100 ; U1.31@53005.54,51125.4 53061,51100 ; J2.10@53094.95,51076 53040.47,51100 ; J2.10@53094.95,51124 53040.47,51100 ; J2.10@53098.23,51085.58 53040.47,51100 ; J2.10@53098.23,51114.42 53040.47,51100
NetJ2_11: J2.11 U1.30 | length 704.1
  BottomLayer w10: U1.30@53000,51000 J2.11@53100,51000 ; U1.30@53000.3,50994.01 53061,51000 ; U1.30@53000.3,51005.99 53061,51000 ; U1.30@53002.1,50984.14 53061,51000 ; U1.30@53002.1,51015.86 53061,51000 ; U1.30@53005.54,50974.6 53061,51000 ; U1.30@53005.54,51025.4 53061,51000 ; J2.11@53094.95,50976 53040.47,51000 ; J2.11@53094.95,51024 53040.47,51000 ; J2.11@53098.23,50985.58 53040.47,51000 ; J2.11@53098.23,51014.42 53040.47,51000
NetJ2_12: J2.12 U1.29 | length 704.1
  BottomLayer w10: U1.29@53000,50900 J2.12@53100,50900 ; U1.29@53000.3,50894.01 53061,50900 ; U1.29@53000.3,50905.99 53061,50900 ; U1.29@53002.1,50884.14 53061,50900 ; U1.29@53002.1,50915.86 53061,50900 ; U1.29@53005.54,50874.6 53061,50900 ; U1.29@53005.54,50925.4 53061,50900 ; J2.12@53094.95,50876 53040.47,50900 ; J2.12@53094.95,50924 53040.47,50900 ; J2.12@53098.23,50885.58 53040.47,50900 ; J2.12@53098.23,50914.42 53040.47,50900
NetJ6_2: J6.2 U4.12 | length 1288.2
  TopLayer w10: U4.12@54488.19,51183.86 54546.21,51153.79 ; U4.12@54493.49,51192.41 54546.21,51153.79 ; U4.12@54500,51200 54550,51150 54550,51075 54575,51050 54950,51050 55000,51000 J6.2@55100,51000 ; U4.12@54507.59,51206.51 54546.21,51153.79 ; U4.12@54516.14,51211.81 54546.21,51153.79 ; J6.2@55089.79,50975.55 55035,51000 ; J6.2@55089.79,51024.45 55035,51000 ; J6.2@55093.12,50985.12 55035,51000 ; J6.2@55093.12,51014.88 55035,51000 ; J6.2@55095,51000 55035,51000
NetK1_1: K1.1 K1.4 K5.1 K5.4 R4.2 R4.4 | length 3820.6
  TopLayer w10: K1.1@53839.3,52339.9 53900,52325 ; K1.1@53842.5,52349.51 53900,52325 ; K1.1@53860.38,52373.33 53900,52325 ; K5.1@53864.44,51859.66 53900,51912.2 ; K5.4@53864.46,52090.31 53900,52038.05 ; K5.4@53864.46,52109.7 53900,52161.9 ; K1.1@53868.7,52379.1 53900,52325 ; K5.1@53873.25,51854.67 53900,51912.2 ; K5.4@53873.25,52095.31 53900,52038.05 ; K5.4@53873.25,52104.69 53900,52161.9 ; K5.1@53887.5,51850 53900,51912.2 ; K5.1@53900,51850 53900,52325 ; K5.1@53902.45,51848.8 53900,51912.2 ; K5.4@53902.45,52098.8 53900,52161.9 ; K5.4@53902.45,52101.2 53900,52038.05 ; K5.1@53912.5,51850 53900,51912.2 ; K1.4@54076.43,52370.83 54100,52400 ; K1.4@54085.3,52365.5 54100,52400 ; K1.4@54100,52362.5 54100,52400 ; K1.4@54114.7,52365.5 54100,52400 ; K1.4@54123.57,52370.83 54100,52400 ; R4.4@54283.81,52508.79 54253.2,52453.2 ; R4.4@54292.22,52503.25 54253.2,52453.2 ; R4.4@54300,52496.06 54253.2,52453.2 ; R4.4@54301.01,52489.46 54355.59,52500 ; R4.4@54301.01,52510.54 54355.59,52500 ; R4.4@54303.81,52479.77 54355.59,52500 ; R4.4@54303.81,52520.23 54355.59,52500 ; R4.4@54306.48,52487.68 54253.2,52453.2 ; R4.4@54311.26,52478.82 54253.2,52453.2 ; R4.2@54396.36,52480.33 54345,52500 ; R4.2@54396.36,52519.67 54345,52500 ; R4.2@54399.09,52490.04 54345,52500 ; R4.2@54399.09,52509.96 54345,52500 ; R4.2@54400,52500 R4.4@54300,52500 54250,52450 54150,52450 54100,52400 ; 53900,52038.05 53912.5,52100 53900,52161.9 ; 53900,52038.05 K5.4@53887.5,52100 53900,52161.9 ; 53900,52325 53862.5,52362.5 K1.1@53850,52362.5 53900,52325
  BottomLayer w10: K1.1@53850,52362.5 K1.4@54100,52362.5 ; K1.1@53851.88,52347.62 53910,52362.5 ; K1.1@53851.88,52377.38 53910,52362.5 ; K1.1@53855.21,52338.05 53910,52362.5 ; K1.1@53855.21,52386.95 53910,52362.5 ; K1.4@54094.79,52338.05 54040,52362.5 ; K1.4@54094.79,52386.95 54040,52362.5 ; K1.4@54098.12,52347.62 54040,52362.5 ; K1.4@54098.12,52377.38 54040,52362.5
NetK2_1: K2.1 K2.4 K6.1 K6.4 R6.2 R6.4 | length 4032.1
  TopLayer w10: K6.1@54136.99,52083.85 54187.5,52100 ; K6.1@54141,52074.5 54187.5,52100 ; K6.1@54150,52062.5 54187.5,52100 ; K6.1@54162,52053.5 54187.5,52100 ; K2.1@54163.05,52155.21 54187.5,52210 ; K2.4@54163.05,52394.79 54187.5,52340 ; K2.1@54163.29,52143.75 54187.5,52100 ; K6.1@54171.35,52049.49 54187.5,52100 ; K2.1@54172.62,52151.88 54187.5,52210 ; K2.4@54172.62,52398.12 54187.5,52340 ; K2.1@54172.67,52147.75 54187.5,52100 ; K2.4@54187.5,52400 K2.1@54187.5,52150 54187.5,52100 ; K2.1@54202.33,52147.75 54187.5,52100 ; K2.1@54202.38,52151.88 54187.5,52210 ; K2.4@54202.38,52398.12 54187.5,52340 ; K2.1@54211.71,52143.75 54187.5,52100 ; K2.1@54211.95,52155.21 54187.5,52210 ; K2.4@54211.95,52394.79 54187.5,52340 ; v1@54640.05,52301.02 54650,52349 v1@54659.95,52301.02 ; v1(54650,52300) 54650,52450 R6.4@54700,52500 R6.2@54800,52500 ; R6.4@54683.81,52508.79 54653.2,52453.2 ; R6.4@54692.22,52503.25 54653.2,52453.2 ; R6.4@54700,52496.06 54653.2,52453.2 ; R6.4@54701.01,52489.46 54755.59,52500 ; R6.4@54701.01,52510.54 54755.59,52500 ; R6.4@54703.81,52479.77 54755.59,52500 ; R6.4@54703.81,52520.23 54755.59,52500 ; R6.4@54706.48,52487.68 54653.2,52453.2 ; R6.4@54711.26,52478.82 54653.2,52453.2 ; R6.2@54796.36,52480.33 54745,52500 ; R6.2@54796.36,52519.67 54745,52500 ; R6.2@54799.09,52490.04 54745,52500 ; R6.2@54799.09,52509.96 54745,52500
  BottomLayer w10: K6.1@54150,52062.5 K6.4@54400,52062.5 ; K6.1@54151.88,52047.62 54210,52062.5 ; K6.1@54151.88,52077.38 54210,52062.5 ; K6.1@54155.21,52038.05 54210,52062.5 ; K6.1@54155.21,52086.95 54210,52062.5 ; K2.4@54163.05,52394.79 54187.5,52340 ; K2.4@54172.62,52398.12 54187.5,52340 ; K2.4@54187.5,52400 54187.5,52337.5 54225,52300 v1(54650,52300) ; K2.4@54202.38,52398.12 54187.5,52340 ; K2.4@54211.95,52394.79 54187.5,52340 ; K6.4@54394.79,52038.05 54340,52062.5 ; K6.4@54394.79,52086.95 54340,52062.5 ; K6.4@54398.12,52047.62 54340,52062.5 ; K6.4@54398.12,52077.38 54340,52062.5 ; v1@54648.98,52290.05 54601,52300 v1@54648.98,52309.95
NetK3_1: K3.1 K3.4 K7.1 K7.4 R24.2 R24.4 | length 4132.2
  TopLayer w10: K3.1@54435.73,52341.98 54500,52312.5 ; K3.1@54440.58,52350.83 54500,52312.5 ; K3.1@54450,52362.5 54500,52312.5 ; K3.1@54461.67,52371.92 54500,52312.5 ; K7.1@54464.44,51859.66 54500,51912.2 ; K7.4@54464.46,52090.31 54500,52038.05 ; K7.4@54464.46,52109.71 54500,52161.86 ; K3.1@54470.52,52376.77 54500,52312.5 ; K7.1@54473.25,51854.67 54500,51912.2 ; K7.4@54473.25,52095.31 54500,52038.05 ; K7.4@54473.25,52104.7 54500,52161.86 ; K7.1@54487.5,51850 54500,51912.2 ; K7.1@54500,51850 54500,52312.5 ; K7.1@54502.45,51848.8 54500,51912.2 ; K7.4@54502.45,52098.8 54500,52161.86 ; K7.4@54502.45,52101.2 54500,52038.05 ; K7.1@54512.5,51850 54500,51912.2 ; R24.4@55100,52500 R24.2@55200,52500 ; R24.4@55101.01,52489.46 55155.59,52500 ; R24.4@55101.01,52510.54 55155.59,52500 ; R24.4@55103.81,52479.77 55155.59,52500 ; R24.4@55103.81,52520.23 55155.59,52500 ; R24.2@55196.36,52480.33 55145,52500 ; R24.2@55196.36,52519.67 55145,52500 ; R24.2@55199.09,52490.04 55145,52500 ; R24.2@55199.09,52509.96 55145,52500 ; 54500,52038.05 54512.5,52100 54500,52161.86 ; 54500,52038.05 K7.4@54487.5,52100 54500,52161.86
  BottomLayer w10: K3.1@54450,52362.5 K3.4@54700,52362.5 54700,52425 54725,52450 55150,52450 R24.2@55200,52500 ; K3.1@54451.88,52347.62 54510,52362.5 ; K3.1@54451.88,52377.38 54510,52362.5 ; K3.1@54455.21,52338.05 54510,52362.5 ; K3.1@54455.21,52386.95 54510,52362.5 ; K3.4@54675.55,52367.71 54700,52422.5 ; K3.4@54685.12,52364.38 54700,52422.5 ; K3.4@54694.79,52338.05 54640,52362.5 ; K3.4@54694.79,52386.95 54640,52362.5 ; K3.4@54698.12,52347.62 54640,52362.5 ; K3.4@54698.12,52377.38 54640,52362.5 ; K3.4@54714.88,52364.38 54700,52422.5 ; K3.4@54724.45,52367.71 54700,52422.5 ; R24.2@55183.86,52511.81 55153.79,52453.79 ; R24.2@55192.41,52506.51 55153.79,52453.79 ; R24.2@55206.51,52492.41 55153.79,52453.79 ; R24.2@55211.81,52483.86 55153.79,52453.79
NetK4_1: K4.1 K4.4 K8.1 K8.4 R25.2 R25.4 | length 3988.9
  TopLayer w10: K8.1@54736.99,52083.85 54787.5,52100 ; K8.1@54741,52074.5 54787.5,52100 ; K8.1@54750,52062.5 54787.5,52100 ; K8.1@54762,52053.5 54787.5,52100 ; K4.1@54763.05,52155.21 54787.5,52210 ; K4.4@54763.05,52394.79 54787.5,52340 ; K4.1@54763.29,52143.75 54787.5,52100 ; K8.1@54771.35,52049.49 54787.5,52100 ; K4.1@54772.62,52151.88 54787.5,52210 ; K4.4@54772.62,52398.12 54787.5,52340 ; K4.1@54772.67,52147.75 54787.5,52100 ; K4.4@54787.5,52400 K4.1@54787.5,52150 54787.5,52100 ; K4.1@54802.33,52147.75 54787.5,52100 ; K4.1@54802.38,52151.88 54787.5,52210 ; K4.4@54802.38,52398.12 54787.5,52340 ; K4.1@54811.71,52143.75 54787.5,52100 ; K4.1@54811.95,52155.21 54787.5,52210 ; K4.4@54811.95,52394.79 54787.5,52340 ; R25.4@55500,52500 R25.2@55600,52500 ; R25.4@55501.01,52489.46 55555.59,52500 ; R25.4@55501.01,52510.54 55555.59,52500 ; R25.4@55503.81,52479.77 55555.59,52500 ; R25.4@55503.81,52520.23 55555.59,52500 ; R25.2@55596.36,52480.33 55545,52500 ; R25.2@55596.36,52519.67 55545,52500 ; R25.2@55599.09,52490.04 55545,52500 ; R25.2@55599.09,52509.96 55545,52500
  BottomLayer w10: K8.1@54750,52062.5 K8.4@55000,52062.5 ; K8.1@54751.88,52047.62 54810,52062.5 ; K8.1@54751.88,52077.38 54810,52062.5 ; K8.1@54755.21,52038.05 54810,52062.5 ; K8.1@54755.21,52086.95 54810,52062.5 ; K4.4@54773.23,52379.48 54837.5,52350 ; K4.4@54778.08,52388.33 54837.5,52350 ; K4.4@54787.5,52400 54837.5,52350 ; K4.4@54799.17,52409.42 54837.5,52350 ; K4.4@54808.02,52414.27 54837.5,52350 ; K8.4@54994.79,52038.05 54940,52062.5 ; K8.4@54994.79,52086.95 54940,52062.5 ; K8.4@54998.12,52047.62 54940,52062.5 ; K8.4@54998.12,52077.38 54940,52062.5 ; R25.2@55580.33,52496.36 55600,52445 ; R25.2@55590.04,52499.09 55600,52445 ; R25.2@55600,52500 55600,52375 55575,52350 54837.5,52350 ; R25.2@55609.96,52499.09 55600,52445 ; R25.2@55619.67,52496.36 55600,52445
P00: J1.1 U1.1 | length 704.1
  BottomLayer w10: J1.1@52300,52000 U1.1@52400,52000 ; J1.1@52301.77,51985.58 52359.53,52000 ; J1.1@52301.77,52014.42 52359.53,52000 ; J1.1@52305.05,51976 52359.53,52000 ; J1.1@52305.05,52024 52359.53,52000 ; U1.1@52394.46,51974.6 52339,52000 ; U1.1@52394.46,52025.4 52339,52000 ; U1.1@52397.9,51984.14 52339,52000 ; U1.1@52397.9,52015.86 52339,52000 ; U1.1@52399.7,51994.01 52339,52000 ; U1.1@52399.7,52005.99 52339,52000
P01: J1.2 U1.2 | length 704.1
  BottomLayer w10: J1.2@52300,51900 U1.2@52400,51900 ; J1.2@52301.77,51885.58 52359.53,51900 ; J1.2@52301.77,51914.42 52359.53,51900 ; J1.2@52305.05,51876 52359.53,51900 ; J1.2@52305.05,51924 52359.53,51900 ; U1.2@52394.46,51874.6 52339,51900 ; U1.2@52394.46,51925.4 52339,51900 ; U1.2@52397.9,51884.14 52339,51900 ; U1.2@52397.9,51915.86 52339,51900 ; U1.2@52399.7,51894.01 52339,51900 ; U1.2@52399.7,51905.99 52339,51900
P02: J1.3 U1.3 | length 704.1
  BottomLayer w10: J1.3@52300,51800 U1.3@52400,51800 ; J1.3@52301.77,51785.58 52359.53,51800 ; J1.3@52301.77,51814.42 52359.53,51800 ; J1.3@52305.05,51776 52359.53,51800 ; J1.3@52305.05,51824 52359.53,51800 ; U1.3@52394.46,51774.6 52339,51800 ; U1.3@52394.46,51825.4 52339,51800 ; U1.3@52397.9,51784.14 52339,51800 ; U1.3@52397.9,51815.86 52339,51800 ; U1.3@52399.7,51794.01 52339,51800 ; U1.3@52399.7,51805.99 52339,51800
P03: J1.4 U1.4 | length 704.1
  BottomLayer w10: J1.4@52300,51700 U1.4@52400,51700 ; J1.4@52301.77,51685.58 52359.53,51700 ; J1.4@52301.77,51714.42 52359.53,51700 ; J1.4@52305.05,51676 52359.53,51700 ; J1.4@52305.05,51724 52359.53,51700 ; U1.4@52394.46,51674.6 52339,51700 ; U1.4@52394.46,51725.4 52339,51700 ; U1.4@52397.9,51684.14 52339,51700 ; U1.4@52397.9,51715.86 52339,51700 ; U1.4@52399.7,51694.01 52339,51700 ; U1.4@52399.7,51705.99 52339,51700
P04: J1.5 U1.5 | length 1002.6
  BottomLayer w20: J1.5@52298.05,51580.57 U1.5@52388.31,51581.32 ; J1.5@52298.05,51619.43 U1.5@52388.31,51618.68 ; J1.5@52302.13,51580.59 52389.53,51600 J1.5@52302.13,51619.41 ; J1.5@52306.08,51581.44 U1.5@52388.31,51618.68 ; J1.5@52306.08,51618.56 U1.5@52388.31,51581.32 ; U1.5@52397.58,51579.14 52309,51600 U1.5@52397.58,51620.86 ; U1.5@52400,51600 J1.5@52300,51600 ; J1.5@52300,51600 U1.5@52388.31,51581.32 ; J1.5@52300,51600 U1.5@52388.31,51618.68
P05: J1.6 U1.6 | length 1002.6
  BottomLayer w20: J1.6@52298.05,51480.57 U1.6@52388.31,51481.32 ; J1.6@52298.05,51519.43 U1.6@52388.31,51518.68 ; J1.6@52302.13,51480.59 52389.53,51500 J1.6@52302.13,51519.41 ; J1.6@52306.08,51481.44 U1.6@52388.31,51518.68 ; J1.6@52306.08,51518.56 U1.6@52388.31,51481.32 ; U1.6@52397.58,51479.14 52309,51500 U1.6@52397.58,51520.86 ; U1.6@52400,51500 J1.6@52300,51500 ; J1.6@52300,51500 U1.6@52388.31,51481.32 ; J1.6@52300,51500 U1.6@52388.31,51518.68
P06: J1.7 U1.7 | length 704.1
  BottomLayer w10: J1.7@52300,51400 U1.7@52400,51400 ; J1.7@52301.77,51385.58 52359.53,51400 ; J1.7@52301.77,51414.42 52359.53,51400 ; J1.7@52305.05,51376 52359.53,51400 ; J1.7@52305.05,51424 52359.53,51400 ; U1.7@52394.46,51374.6 52339,51400 ; U1.7@52394.46,51425.4 52339,51400 ; U1.7@52397.9,51384.14 52339,51400 ; U1.7@52397.9,51415.86 52339,51400 ; U1.7@52399.7,51394.01 52339,51400 ; U1.7@52399.7,51405.99 52339,51400
P07: J1.8 U1.8 | length 704.1
  BottomLayer w10: J1.8@52300,51300 U1.8@52400,51300 ; J1.8@52301.77,51285.58 52359.53,51300 ; J1.8@52301.77,51314.42 52359.53,51300 ; J1.8@52305.05,51276 52359.53,51300 ; J1.8@52305.05,51324 52359.53,51300 ; U1.8@52394.46,51274.6 52339,51300 ; U1.8@52394.46,51325.4 52339,51300 ; U1.8@52397.9,51284.14 52339,51300 ; U1.8@52397.9,51315.86 52339,51300 ; U1.8@52399.7,51294.01 52339,51300 ; U1.8@52399.7,51305.99 52339,51300
P10: J1.9 U1.9 | length 704.1
  BottomLayer w10: J1.9@52300,51200 U1.9@52400,51200 ; J1.9@52301.77,51185.58 52359.53,51200 ; J1.9@52301.77,51214.42 52359.53,51200 ; J1.9@52305.05,51176 52359.53,51200 ; J1.9@52305.05,51224 52359.53,51200 ; U1.9@52394.46,51174.6 52339,51200 ; U1.9@52394.46,51225.4 52339,51200 ; U1.9@52397.9,51184.14 52339,51200 ; U1.9@52397.9,51215.86 52339,51200 ; U1.9@52399.7,51194.01 52339,51200 ; U1.9@52399.7,51205.99 52339,51200
P11: J1.10 U1.10 | length 704.1
  BottomLayer w10: J1.10@52300,51100 U1.10@52400,51100 ; J1.10@52301.77,51085.58 52359.53,51100 ; J1.10@52301.77,51114.42 52359.53,51100 ; J1.10@52305.05,51076 52359.53,51100 ; J1.10@52305.05,51124 52359.53,51100 ; U1.10@52394.46,51074.6 52339,51100 ; U1.10@52394.46,51125.4 52339,51100 ; U1.10@52397.9,51084.14 52339,51100 ; U1.10@52397.9,51115.86 52339,51100 ; U1.10@52399.7,51094.01 52339,51100 ; U1.10@52399.7,51105.99 52339,51100
P12: J1.11 U1.11 | length 704.1
  BottomLayer w10: J1.11@52300,51000 U1.11@52400,51000 ; J1.11@52301.77,50985.58 52359.53,51000 ; J1.11@52301.77,51014.42 52359.53,51000 ; J1.11@52305.05,50976 52359.53,51000 ; J1.11@52305.05,51024 52359.53,51000 ; U1.11@52394.46,50974.6 52339,51000 ; U1.11@52394.46,51025.4 52339,51000 ; U1.11@52397.9,50984.14 52339,51000 ; U1.11@52397.9,51015.86 52339,51000 ; U1.11@52399.7,50994.01 52339,51000 ; U1.11@52399.7,51005.99 52339,51000
P13: J1.12 U1.12 | length 1002.6
  BottomLayer w20: J1.12@52298.05,50880.57 U1.12@52388.31,50881.32 ; J1.12@52298.05,50919.43 U1.12@52388.31,50918.68 ; J1.12@52302.13,50880.59 52389.53,50900 J1.12@52302.13,50919.41 ; J1.12@52306.08,50881.44 U1.12@52388.31,50918.68 ; J1.12@52306.08,50918.56 U1.12@52388.31,50881.32 ; U1.12@52397.58,50879.14 52309,50900 U1.12@52397.58,50920.86 ; U1.12@52400,50900 J1.12@52300,50900 ; J1.12@52300,50900 U1.12@52388.31,50918.68 ; J1.12@52300,50900 U1.12@52388.31,50881.32
P14: J1.13 U1.13 | length 1002.6
  BottomLayer w20: J1.13@52298.05,50780.57 U1.13@52388.31,50781.32 ; J1.13@52298.05,50819.43 U1.13@52388.31,50818.68 ; J1.13@52302.13,50780.59 52389.53,50800 J1.13@52302.13,50819.41 ; J1.13@52306.08,50781.44 U1.13@52388.31,50818.68 ; J1.13@52306.08,50818.56 U1.13@52388.31,50781.32 ; U1.13@52397.58,50779.14 52309,50800 U1.13@52397.58,50820.86 ; U1.13@52400,50800 J1.13@52300,50800 ; J1.13@52300,50800 U1.13@52388.31,50781.32 ; J1.13@52300,50800 U1.13@52388.31,50818.68
P15: J1.14 U1.14 | length 1002.6
  BottomLayer w20: J1.14@52298.05,50680.57 U1.14@52388.31,50681.32 ; J1.14@52298.05,50719.43 U1.14@52388.31,50718.68 ; J1.14@52302.13,50680.59 52389.53,50700 J1.14@52302.13,50719.41 ; J1.14@52306.08,50681.44 U1.14@52388.31,50718.68 ; J1.14@52306.08,50718.56 U1.14@52388.31,50681.32 ; U1.14@52397.58,50679.14 52309,50700 U1.14@52397.58,50720.86 ; U1.14@52400,50700 J1.14@52300,50700 ; J1.14@52300,50700 U1.14@52388.31,50681.32 ; J1.14@52300,50700 U1.14@52388.31,50718.68
P16: J1.15 U1.15 | length 1002.6
  BottomLayer w20: J1.15@52298.05,50580.57 U1.15@52388.31,50581.32 ; J1.15@52298.05,50619.43 U1.15@52388.31,50618.68 ; J1.15@52302.13,50580.59 52389.53,50600 J1.15@52302.13,50619.41 ; J1.15@52306.08,50581.44 U1.15@52388.31,50618.68 ; J1.15@52306.08,50618.56 U1.15@52388.31,50581.32 ; U1.15@52397.58,50579.14 52309,50600 U1.15@52397.58,50620.86 ; U1.15@52400,50600 J1.15@52300,50600 ; J1.15@52300,50600 U1.15@52388.31,50581.32 ; J1.15@52300,50600 U1.15@52388.31,50618.68
P17: J1.16 R8.2 R8.4 U1.16 | length 3310.2
  TopLayer w10: v1@52240.05,49951.02 52250,49999 v1@52259.95,49951.02 ; v1(52250,49950) 52250,50475 ; J1.16@52284.49,50519 52250,50475 ; J1.16@52291.87,50512.04 52250,50475 ; J1.16@52304.75,50486.27 52250,50475 ; J1.16@52305.89,50476.19 52250,50475 ; R8.2@52600,49900 R8.4@52700,49900 ; R8.2@52600.91,49890.04 52655,49900 ; R8.2@52600.91,49909.96 52655,49900 ; R8.2@52603.64,49880.33 52655,49900 ; R8.2@52603.64,49919.67 52655,49900 ; R8.4@52696.19,49879.77 52644.41,49900 ; R8.4@52696.19,49920.23 52644.41,49900 ; R8.4@52698.99,49889.46 52644.41,49900 ; R8.4@52698.99,49910.54 52644.41,49900 ; 52250,50475 52275,50500 J1.16@52300,50500 52250,50475
  BottomLayer w10: v1(52250,49950) 52525,49950 52575,49900 R8.2@52600,49900 52542,49933 ; v1@52251.02,49940.05 52299,49950 v1@52251.02,49959.95 ; R8.2@52587.62,49884.29 52542,49933 ; R8.2@52594.42,49891.7 52542,49933 ; R8.2@52604.28,49909.04 52542,49933 ; R8.2@52607.17,49918.67 52542,49933
  BottomLayer w20: J1.16@52298.05,50480.57 U1.16@52388.31,50481.32 ; J1.16@52298.05,50519.43 U1.16@52388.31,50518.68 ; J1.16@52302.13,50480.59 52389.53,50500 J1.16@52302.13,50519.41 ; J1.16@52306.08,50481.44 U1.16@52388.31,50518.68 ; J1.16@52306.08,50518.56 U1.16@52388.31,50481.32 ; U1.16@52397.58,50479.14 52309,50500 U1.16@52397.58,50520.86 ; U1.16@52400,50500 J1.16@52300,50500 ; J1.16@52300,50500 U1.16@52388.31,50518.68 ; J1.16@52300,50500 U1.16@52388.31,50481.32
P20: J2.9 U1.32 | length 704.1
  BottomLayer w10: U1.32@53000,51200 J2.9@53100,51200 ; U1.32@53000.3,51194.01 53061,51200 ; U1.32@53000.3,51205.99 53061,51200 ; U1.32@53002.1,51184.14 53061,51200 ; U1.32@53002.1,51215.86 53061,51200 ; U1.32@53005.54,51174.6 53061,51200 ; U1.32@53005.54,51225.4 53061,51200 ; J2.9@53094.95,51176 53040.47,51200 ; J2.9@53094.95,51224 53040.47,51200 ; J2.9@53098.23,51185.58 53040.47,51200 ; J2.9@53098.23,51214.42 53040.47,51200
P21: J2.8 U1.33 | length 704.1
  BottomLayer w10: U1.33@53000,51300 J2.8@53100,51300 ; U1.33@53000.3,51294.01 53061,51300 ; U1.33@53000.3,51305.99 53061,51300 ; U1.33@53002.1,51284.14 53061,51300 ; U1.33@53002.1,51315.86 53061,51300 ; U1.33@53005.54,51274.6 53061,51300 ; U1.33@53005.54,51325.4 53061,51300 ; J2.8@53094.95,51276 53040.47,51300 ; J2.8@53094.95,51324 53040.47,51300 ; J2.8@53098.23,51285.58 53040.47,51300 ; J2.8@53098.23,51314.42 53040.47,51300
P22: J2.7 U1.34 | length 704.1
  BottomLayer w10: U1.34@53000,51400 J2.7@53100,51400 ; U1.34@53000.3,51394.01 53061,51400 ; U1.34@53000.3,51405.99 53061,51400 ; U1.34@53002.1,51384.14 53061,51400 ; U1.34@53002.1,51415.86 53061,51400 ; U1.34@53005.54,51374.6 53061,51400 ; U1.34@53005.54,51425.4 53061,51400 ; J2.7@53094.95,51376 53040.47,51400 ; J2.7@53094.95,51424 53040.47,51400 ; J2.7@53098.23,51385.58 53040.47,51400 ; J2.7@53098.23,51414.42 53040.47,51400
P23: J2.6 U1.35 | length 704.1
  BottomLayer w10: U1.35@53000,51500 J2.6@53100,51500 ; U1.35@53000.3,51494.01 53061,51500 ; U1.35@53000.3,51505.99 53061,51500 ; U1.35@53002.1,51484.14 53061,51500 ; U1.35@53002.1,51515.86 53061,51500 ; U1.35@53005.54,51474.6 53061,51500 ; U1.35@53005.54,51525.4 53061,51500 ; J2.6@53094.95,51476 53040.47,51500 ; J2.6@53094.95,51524 53040.47,51500 ; J2.6@53098.23,51485.58 53040.47,51500 ; J2.6@53098.23,51514.42 53040.47,51500
P24: J2.5 U1.36 U2.6 | length 2453.3
  BottomLayer w10: U1.36@53000,51600 J2.5@53100,51600 53225,51725 53225,52625 53250,52650 ; U1.36@53000.3,51594.01 53061,51600 ; U1.36@53000.3,51605.99 53061,51600 ; U1.36@53002.1,51584.14 53061,51600 ; U1.36@53002.1,51615.86 53061,51600 ; U1.36@53005.54,51574.6 53061,51600 ; U1.36@53005.54,51625.4 53061,51600 ; J2.5@53085.88,51620.05 53150.74,51650.74 ; J2.5@53090.82,51611.26 53150.74,51650.74 ; J2.5@53094.95,51576 53040.47,51600 ; J2.5@53094.95,51624 53040.47,51600 ; J2.5@53098.23,51585.58 53040.47,51600 ; J2.5@53098.23,51614.42 53040.47,51600 ; J2.5@53111.26,51590.82 53150.74,51650.74 ; J2.5@53120.05,51585.88 53150.74,51650.74 ; U2.6@53293.24,52624.89 53250,52650 ; U2.6@53293.24,52675.11 53250,52650 ; U2.6@53297.44,52634.21 53250,52650 ; U2.6@53297.44,52665.79 53250,52650 ; U2.6@53299.64,52644.01 53250,52650 ; U2.6@53299.64,52655.99 53250,52650 ; U2.6@53300,52650 53250,52650
P25: J2.4 U1.37 U2.5 | length 2593.4
  BottomLayer w10: U1.37@53000,51700 J2.4@53100,51700 ; U1.37@53000.3,51694.01 53061,51700 ; U1.37@53000.3,51705.99 53061,51700 ; U1.37@53002.1,51684.14 53061,51700 ; U1.37@53002.1,51715.86 53061,51700 ; U1.37@53005.54,51674.6 53061,51700 ; U1.37@53005.54,51725.4 53061,51700 ; J2.4@53085.88,51720.05 53150.74,51750.74 ; J2.4@53090.82,51711.26 53150.74,51750.74 ; J2.4@53094.95,51676 53040.47,51700 ; J2.4@53094.95,51724 53040.47,51700 ; J2.4@53098.23,51685.58 53040.47,51700 ; J2.4@53098.23,51714.42 53040.47,51700 ; J2.4@53111.26,51690.82 53150.74,51750.74 ; J2.4@53120.05,51685.88 53150.74,51750.74 ; U2.5@53294.46,52724.6 53239,52750 ; U2.5@53294.46,52775.4 53239,52750 ; U2.5@53297.9,52734.14 53239,52750 ; U2.5@53297.9,52765.86 53239,52750 ; U2.5@53299.7,52744.01 53239,52750 ; U2.5@53299.7,52755.99 53239,52750 ; U2.5@53300,52750 53225,52750 53200,52725 53200,51800 J2.4@53100,51700 ; 53040.47,51700 J2.4@53100,51700